# Allegro board PROIECT TIE.brd
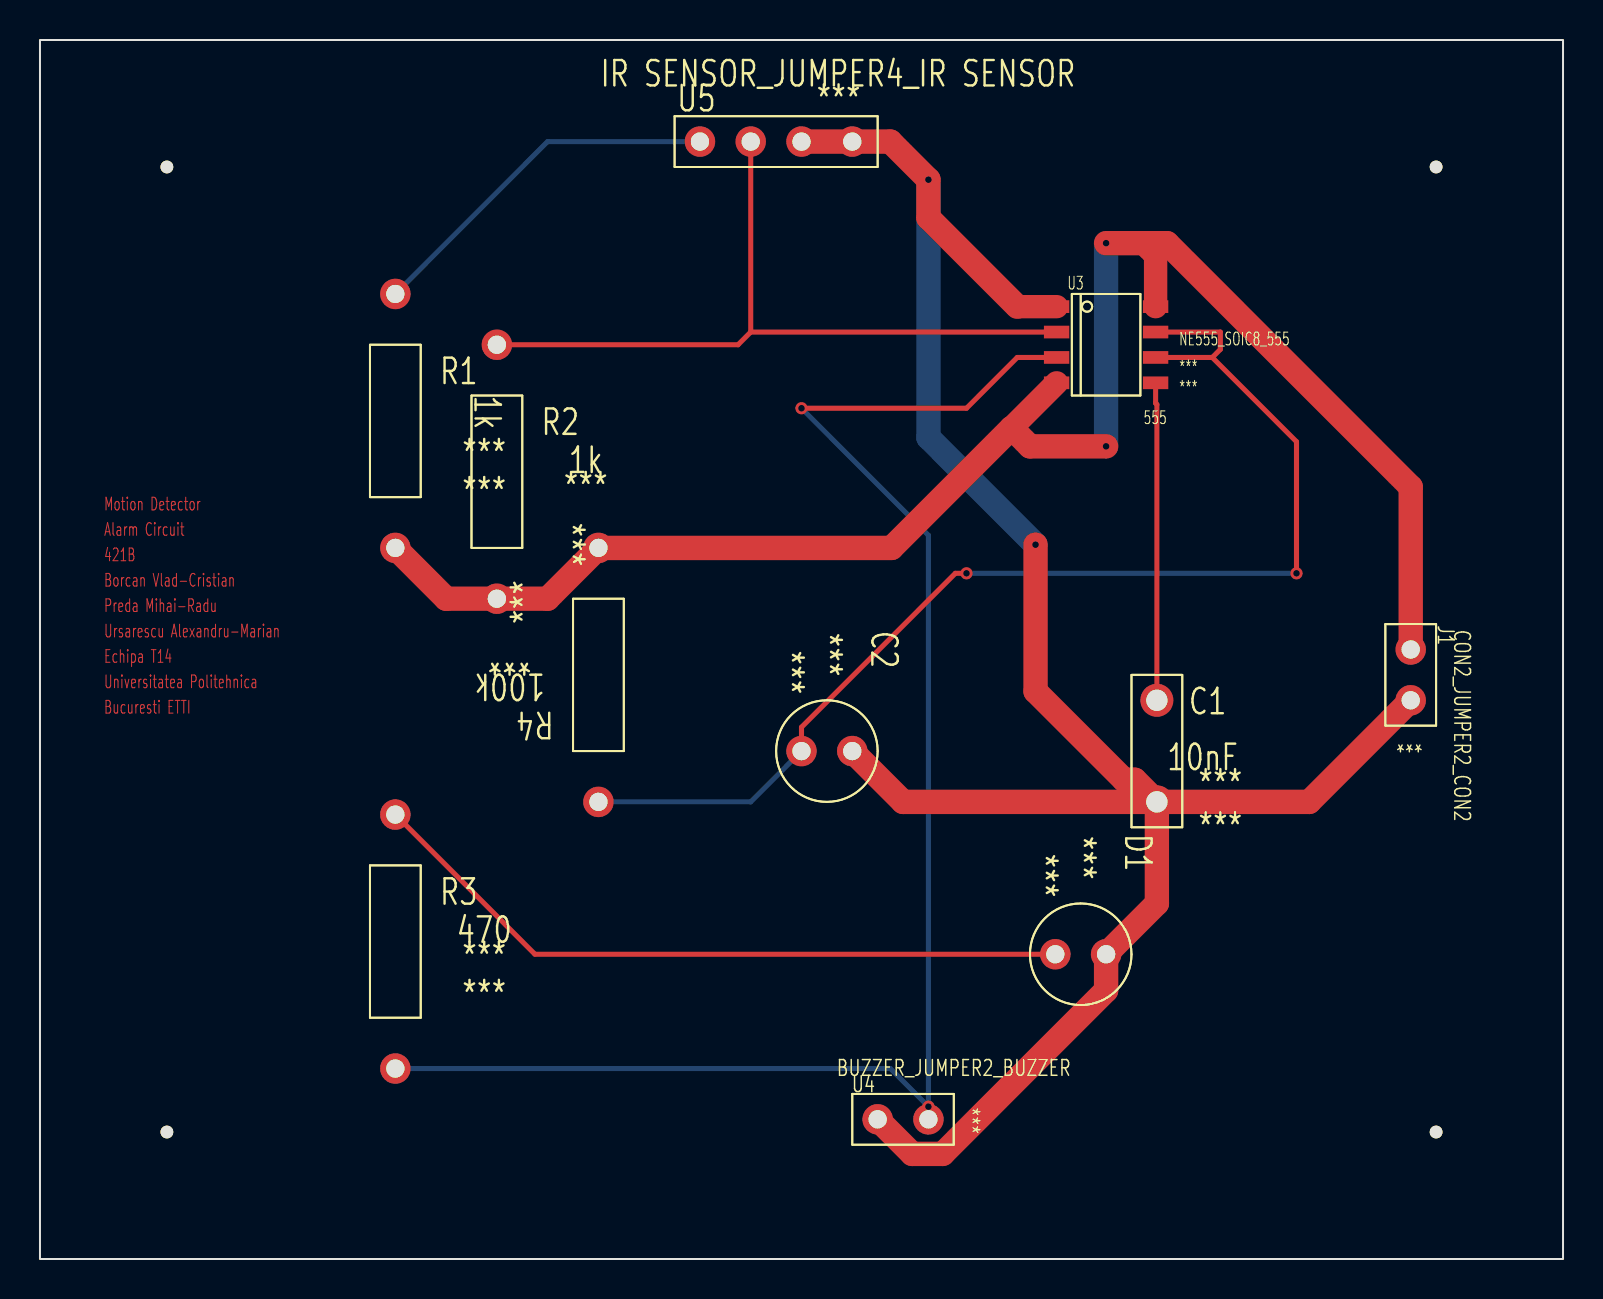
[diagram p0: board, top side]
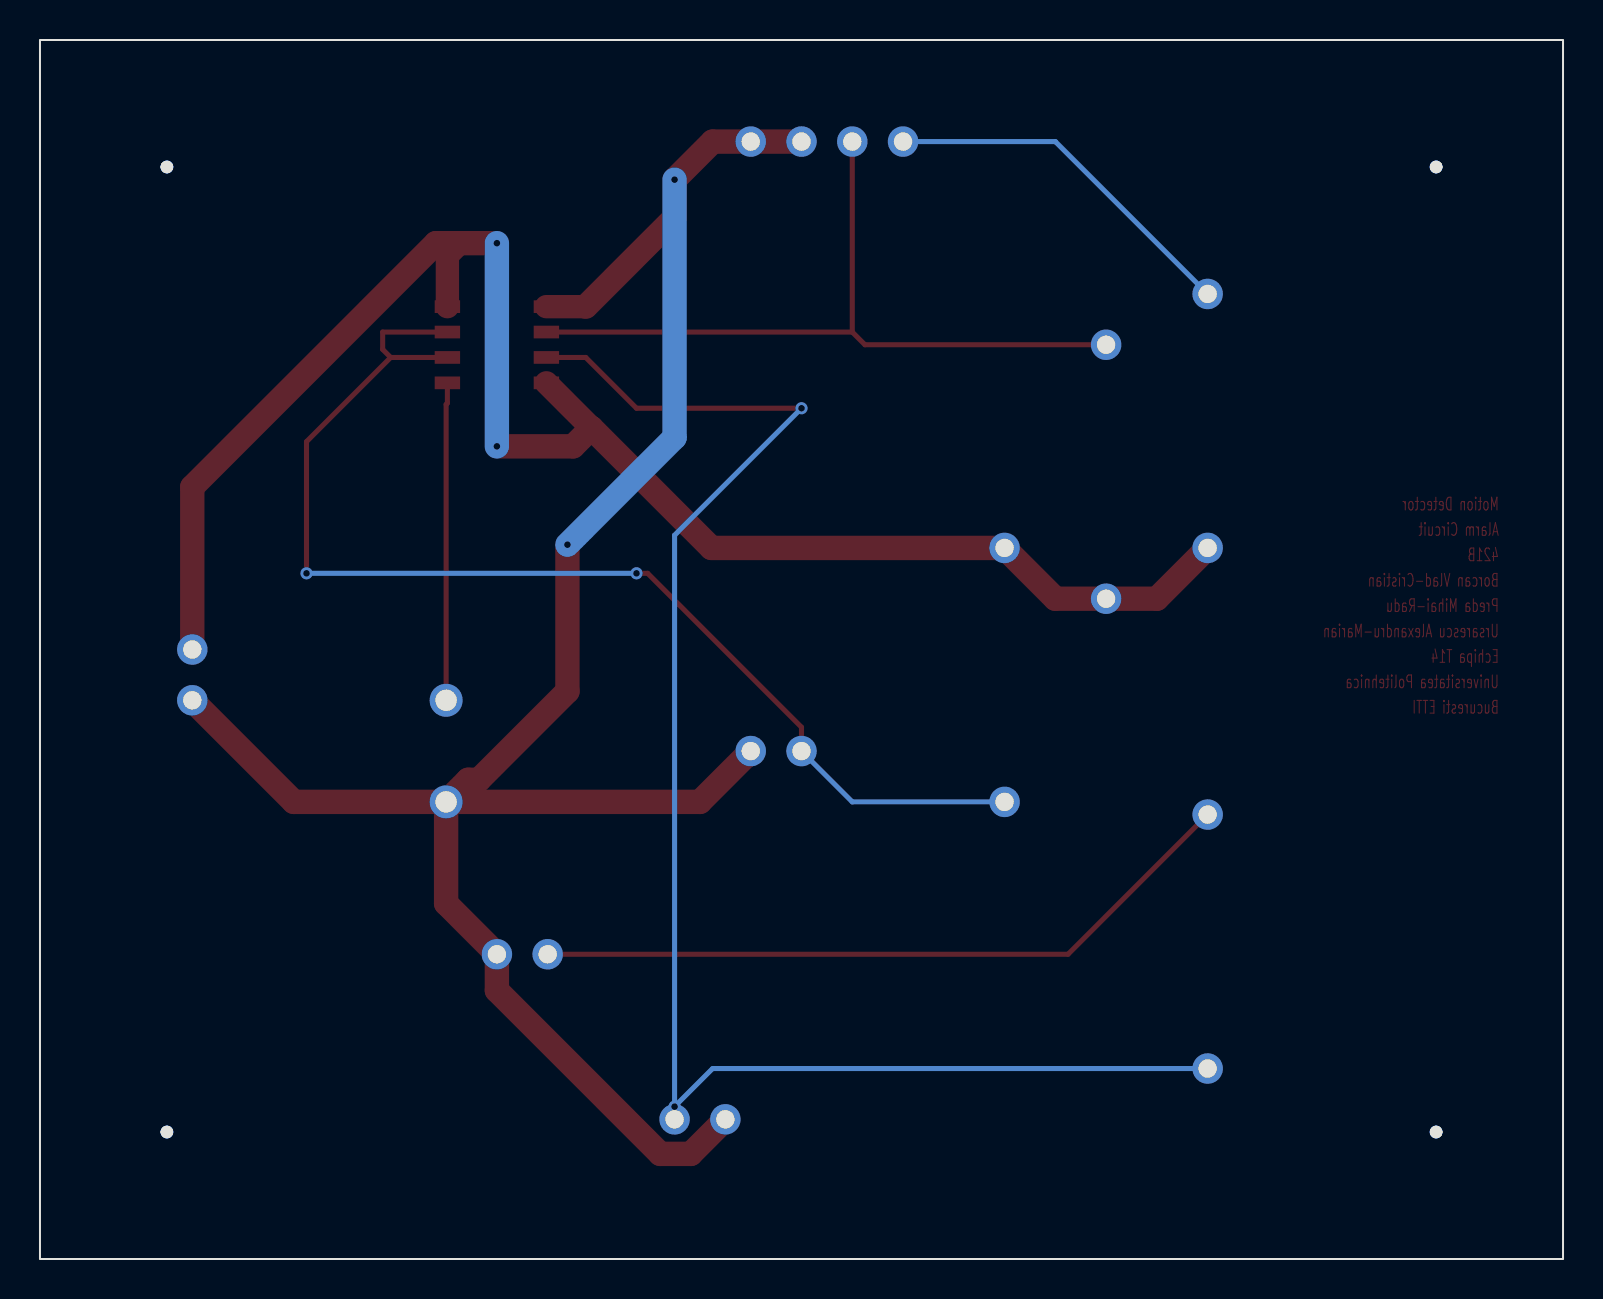
[diagram p1: board, bottom side, seen from below]

Outline 76.2 x 60.96 mm; copper layers: TOP, BOTTOM. Coordinates in mm from the lower left corner of the outline.
Outline path: rectangle 0,0 76.2,60.96

## Design rules (mm)
nets with their own width: min track width 0.254; nets N00401 N00405 N00695 N00702 N001441 N001781
nets with their own width: min track width 1.219; nets +12V GND

## Placement (name value [footprint] x y rotation side)
C1  10nF  [CAPCK06]  55.88 22.86 0 top
C2  100uF/16V  [CAP196]  38.1 25.4 270 top
D1  led  [CAP196]  50.8 15.24 270 top
J1  CON2  [JUMPER2]  68.58 30.48 270 top
NOREF  -  [unnamed]  69.85 54.61 0 top
NOREF#2  -  [unnamed]  69.85 6.35 0 top
NOREF#3  -  [unnamed]  6.35 6.35 0 top
NOREF#4  -  [unnamed]  6.35 54.61 0 top
R1  1k  [RES500]  17.78 48.26 0 top
R2  1k  [RES500]  22.86 45.72 0 top
R3  470  [RES500]  17.78 22.22 0 top
R4  100k  [RES500]  27.94 22.86 180 top
U3  555  [SOIC8]  53.34 45.72 0 top
U4  buzzer  [JUMPER2]  41.91 6.99 0 top
U5  IR sensor  [JUMPER4]  33.02 55.88 0 top

## Library data of the parts
C1 = CAP NP: Tolerance: ***; User Part Number: ***
C2 = CAP POL: Tolerance: ***; User Part Number: ***
D1 = LED: Tolerance: ***; User Part Number: ***
J1 = CON2: User Part Number: ***
R1-R4 = R: Tolerance: ***; User Part Number: ***
U3 = NE555: Tolerance: ***; User Part Number: ***
U4 = buzzer: User Part Number: ***
U5 = IR sensor: User Part Number: ***

## Footprints (pads in the part's own frame, mm; a bottom-side part is the same pattern mirrored in y, then rotated)
CAP196
  round 1.524 hole 0.914: 1(0,0) 2(0,2.54)
CAPCK06
  round 1.651 hole 1.067: 1(0,0) 2(0,5.08)
JUMPER2
  round 1.524 hole 0.914: 1(0,0) 2(2.54,0)
JUMPER4
  round 1.524 hole 0.914: 1(0,0) 2(2.54,0) 3(5.08,0) 4(7.62,0)
RES500
  round 1.524 hole 0.914: 1(0,-12.7) 2(0,0)
SOIC8
  rect 1.27x0.635 smd: 1(-2.477,1.905) 2(-2.477,0.635) 3(-2.477,-0.635) 4(-2.477,-1.905) 5(2.477,-1.905) 6(2.477,-0.635) 7(2.477,0.635) 8(2.477,1.905)
unnamed
  round 0.635 hole 3.175 unplated: (0,0)

## Nets
+12V: J1.1 R1.1 R2.1 R4.1 U3.4 U3.8(VCC)
GND: C1.1 C2.2 D1.2(CATHODE) J1.2 U3.1 U4.1 U5.3 U5.4
N00401: R1.2 U5.1
N00405: R2.2 U3.2 U5.2
N00695: R3.1 U3.3 U4.2
N00702: C2.1 R4.2 U3.6 U3.7
N001441: D1.1 R3.2
N001781: C1.2 U3.5

## Via types
v1: diameter 0.61, hole 0.33, TOP to BOTTOM, 8 vias

## Routing (per net, layer and track width the routed paths; a pad name or vN(x,y) marks a point on that pad's centre or on a via; arc(x,y) is an arc through that point)
+12V: length 85.7
  TOP w1.168: U3.8 55.82,50.23 ; U3.4 48.61,41.56
  TOP w1.219: 55.25,50.8 56.39,50.8 68.58,38.61 J1.1 ; 55.25,50.8 55.82,50.23 ; 55.25,50.8 v1(53.34,50.8) ; v1(53.34,40.64) 49.53,40.64 48.61,41.56 42.61,35.56 R4.1 25.4,33.02 R2.1 20.32,33.02 R1.1
  BOTTOM w1.219: v1(53.34,40.64) v1(53.34,50.8)
GND: length 110.6
  TOP w1.168: 48.89,47.63 U3.1
  TOP w1.219: C1.1 43.18,22.86 C2.2 ; C1.1 54.78,23.96 54.23,23.96 49.81,28.39 v1(49.81,35.72) ; C1.1 55.88,17.78 D1.2 53.34,13.43 45.17,5.26 43.64,5.26 U4.1 ; C1.1 63.5,22.86 J1.2 ; 48.89,47.63 44.45,52.07 v1(44.45,53.97) 42.55,55.88 U5.4 U5.3
  BOTTOM w1.219: v1(49.81,35.72) 44.45,41.08 v1(44.45,53.97)
N00401: length 18.4
  BOTTOM w0.254: R1.2 25.4,55.88 U5.1
N00405: length 37.8
  TOP w0.254: U3.2 35.56,46.35 ; 35.56,46.35 34.93,45.72 R2.2 ; 35.56,46.35 U5.2
N00695: length 79.5
  TOP w0.254: U4.2 v1(44.45,7.62) ; U3.3 48.89,45.09 46.36,42.54 v1(38.1,42.54)
  BOTTOM w0.254: v1(38.1,42.54) 44.45,36.2 v1(44.45,7.62) 42.55,9.53 R3.1
N00702: length 60.4
  TOP w0.254: C2.1 38.1,26.59 45.8,34.29 v1(46.36,34.29) ; v1(62.87,34.29) 62.87,40.87 58.65,45.09 ; 58.65,45.09 59.06,45.49 59.06,46.35 U3.7 ; 58.65,45.09 U3.6
  BOTTOM w0.254: C2.1 35.56,22.86 R4.2 ; v1(46.36,34.29) v1(62.87,34.29)
N001441: length 36.5
  TOP w0.254: 17.78,22.86 R3.2 24.76,15.24 D1.1
N001781: length 15.9
  TOP w0.254: C1.2 55.88,42.73 55.82,42.8 U3.5

## Text on the board
TOP: Motion Detector | Alarm Circuit | 421B | Borcan Vlad-Cristian | Preda Mihai-Radu | Ursarescu Alexandru-Marian | Echipa T14 | Universitatea Politehnica | Bucuresti ETTI
